# Altium PCB Mach cau H.PcbDoc
Units mm, origin at the board's own origin, x right, y up, seen from the top; angles counter-clockwise.
Board outline 86.48 x 56.38 mm, 2 copper layers (Top Layer, Bottom Layer); 34 components, 30 nets, 89 pads, 0 vias.
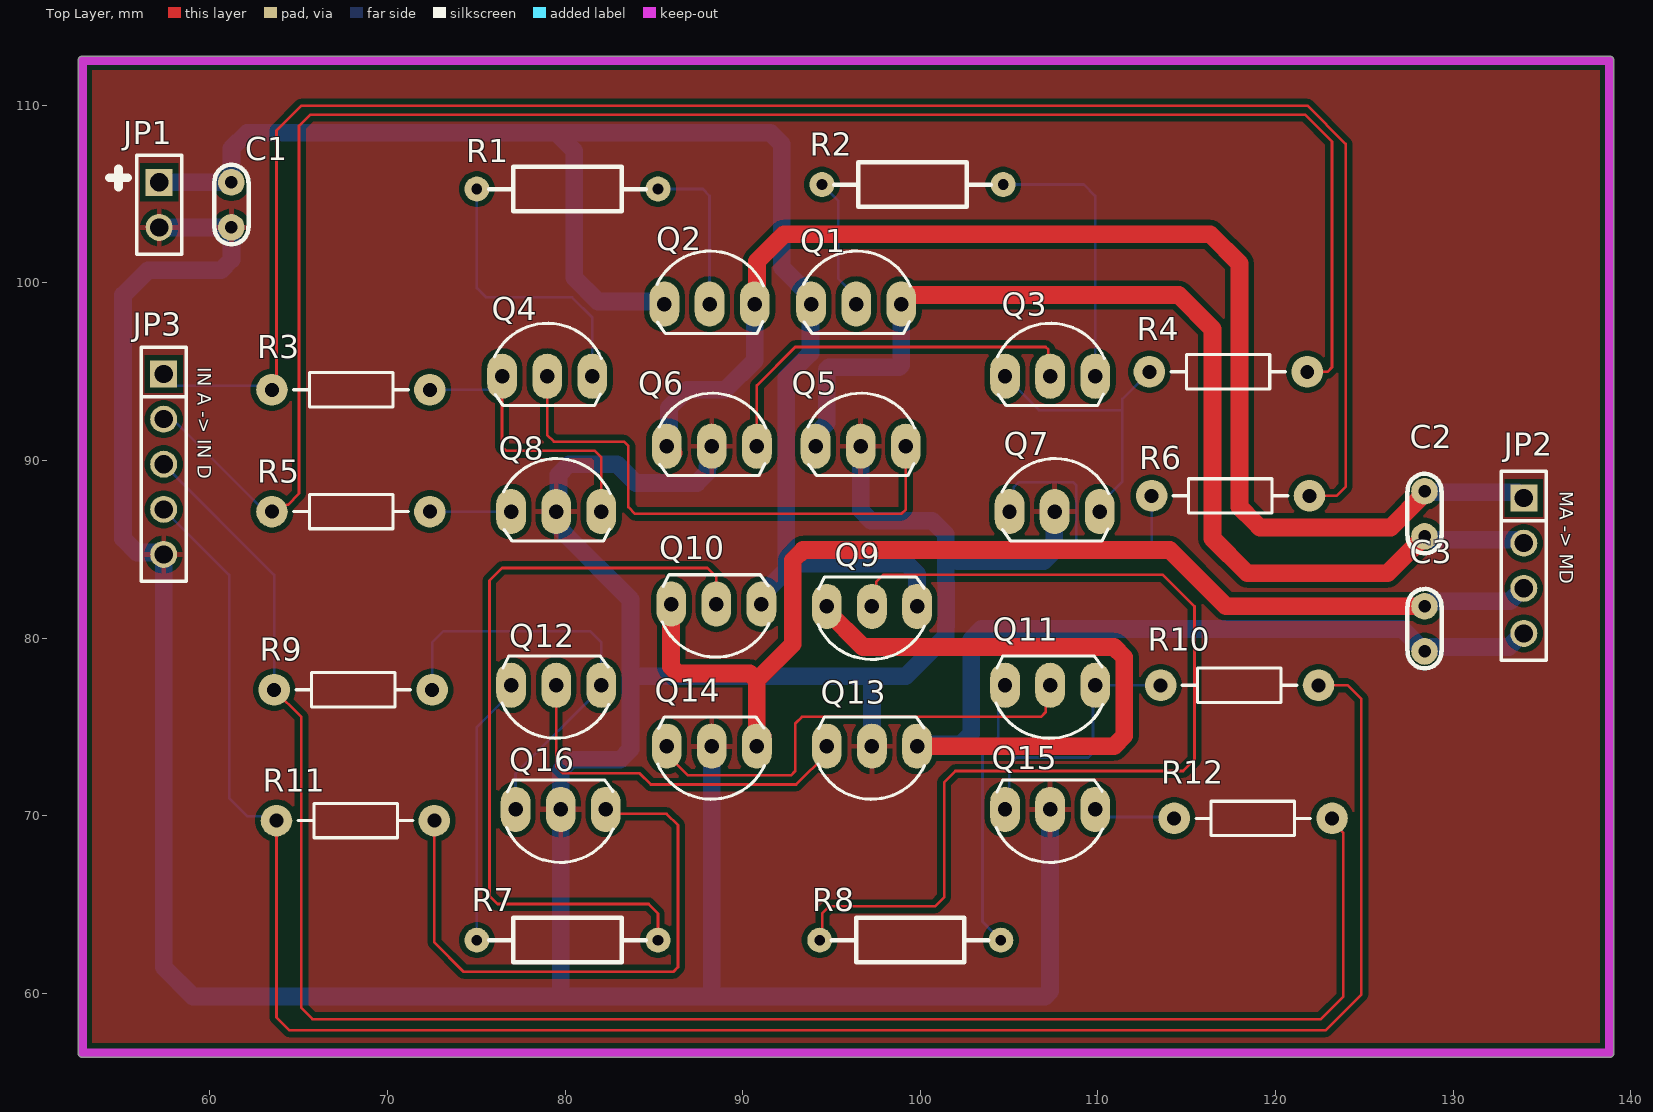
[diagram p0: Top Layer view]
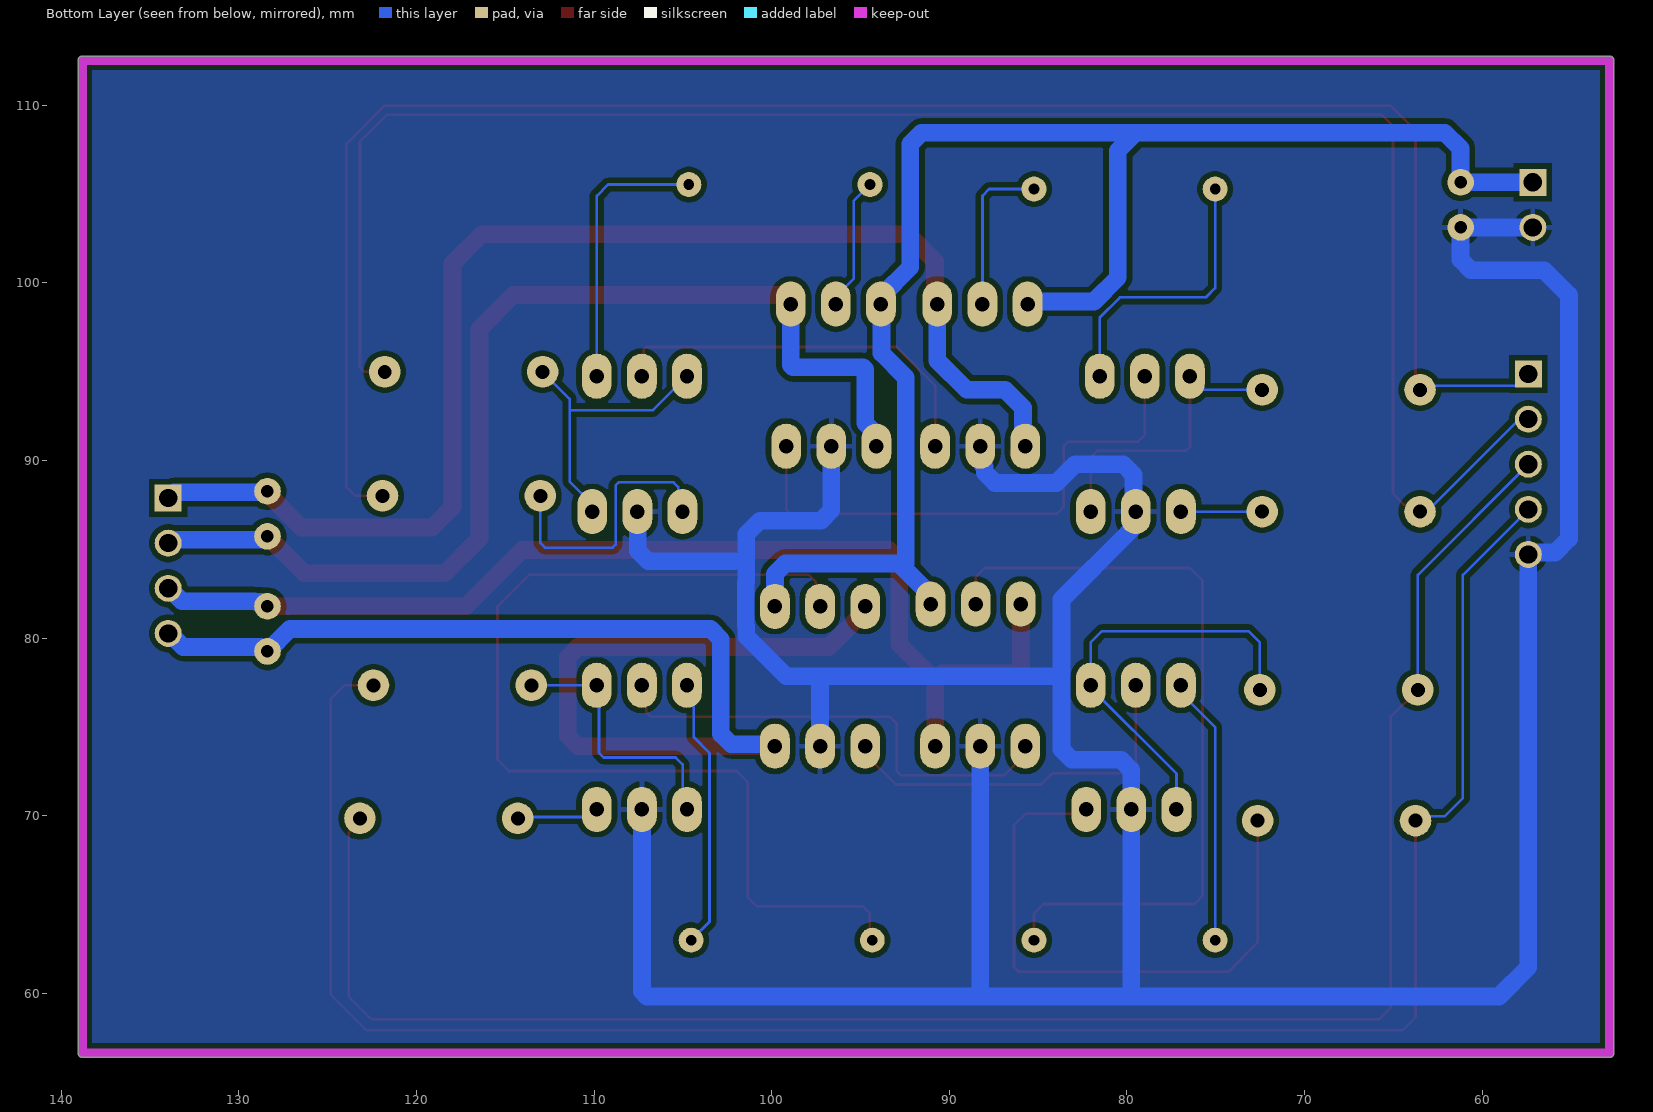
[diagram p1: Bottom Layer view, seen from below]
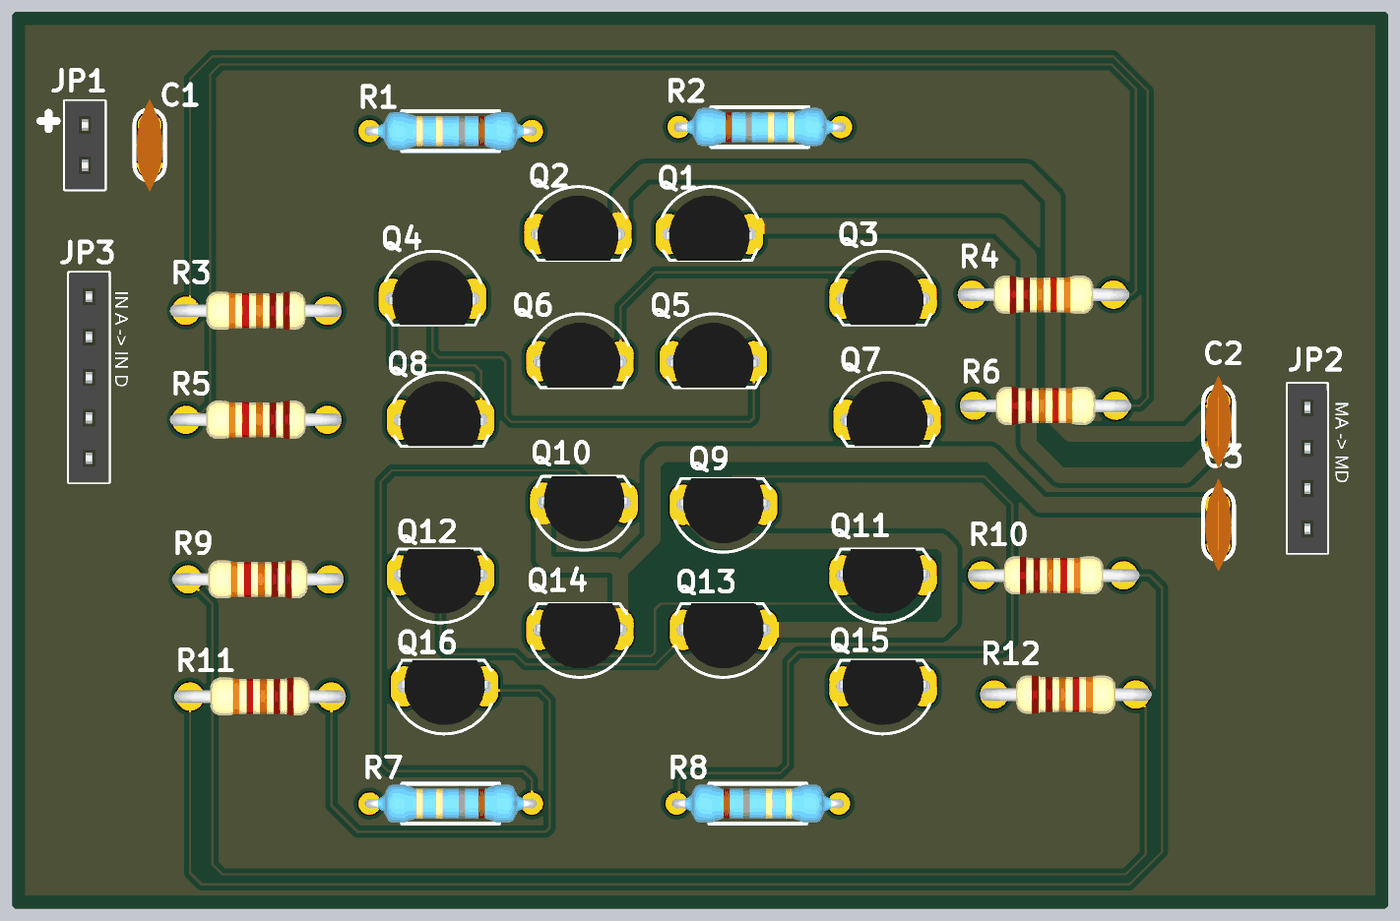
[diagram p2: 3D render of the assembled board from above, using the file's embedded part models]

## Layer stack, top to bottom
Top Solder: solder mask 0.0102, Solder Resist, Dk 3.5
Top Layer: signal copper 0.0356
Dielectric 1: dielectric 0.32, FR-4, Dk 4.8
Bottom Layer: signal copper 0.0356
Bottom Solder: solder mask 0.0102, Solder Resist, Dk 3.5

## Board outline
52.832,56.392 cw(c52.832,56.642) 52.582,56.642 52.582,112.522 cw(c52.832,112.522) 52.832,112.772 138.811,112.772 cw(c138.811,112.522) 139.061,112.522 139.061,56.642 cw(c138.811,56.642) 138.811,56.392

## Design rules (kind name [scope] priority, off if disabled: settings)
Clearance [All] p1: gap=0.3 ignorepadtopadclearanceinfootprint=FALSE
PolygonConnect [All] p1: connectstyle=Relief reliefconductorwidth=0.3 reliefentries=4 polygonreliefangle="90 Angle" airgapwidth=0.3
RoutingVias RoutingVias_Power [InNetClass('Pow class')] p1: holewidth=0.4 width=0.7 viastyle="Through Hole" minholewidth=0.4 minwidth=0.7 maxholewidth=0.6 maxwidth=1.1
RoutingVias RoutingVias_Signal [All] p2: holewidth=0.4 width=0.7 viastyle="Through Hole" minholewidth=0.4 minwidth=0.7 maxholewidth=0.4 maxwidth=0.7
SolderMaskExpansion [All] p1: expansion=0.102 istentingtop=FALSE
Width Width_Power [InNetClass('Pow class')] p1: maxlimit=2 minlimit=0.3 preferedwidth=0.5
Width Width_Signal [All] p2: maxlimit=0.5 minlimit=0.15 preferedwidth=0.15
30 further rules are at their usual default settings.

## Classes and differential pairs
net class "Pow class": GND MA MB MC MD VCC

## Components (designator, comment, footprint, x,y, rotation, side; value= is the part's Value field where it differs from the comment)
C1 "0.1uF, 25V" "tu gom" 61.214,104.394 r270 top
C2 "0.1uF, 25V" "tu gom" 128.397,86.995 r270 top
C3 "0.1uF, 25V" "tu gom" 128.397,80.518 r270 top
JP1 "5V-12VDC" "JP 1x2 CT" 57.15,105.664 r270 top
JP2 "Motor" "JP 1x4 CT" 133.985,87.884 r270 top
JP3 "Controller" "JP 1x5 CT" 57.404,94.869 r270 top
Q1 "C9015" QTO-92 96.393,98.806 r0 top
Q2 "C9015" QTO-92 88.138,98.806 r0 top
Q3 "C1815" QTO-92 107.315,94.742 r0 top
Q4 "C1815" QTO-92 78.994,94.742 r0 top
Q5 "A1015" TO92 96.647,90.805 r0 top
Q6 "A1015" TO92 88.265,90.805 r0 top
Q7 "C1815" QTO-92 107.569,87.122 r0 top
Q8 "C1815" QTO-92 79.502,87.122 r0 top
Q9 "C9015" QTO-92 97.282,81.788 r180 top
Q10 "C9015" QTO-92 88.519,81.915 r180 top
Q11 "C1815" QTO-92 107.315,77.343 r180 top
Q12 "C1815" QTO-92 79.502,77.343 r180 top
Q13 "A1015" TO92 97.282,73.914 r180 top
Q14 "A1015" TO92 88.265,73.914 r180 top
Q15 "C1815" QTO-92 107.315,70.358 r180 top
Q16 "C1815" QTO-92 79.756,70.358 r180 top
R1 "220R, 1/4W" "tro vach 1/4w" 80.137,105.283 r0 top
R2 "220R, 1/4W" "tro vach 1/4w" 99.568,105.537 r180 top
R3 "2k2, 1/8W" R1/4W 63.5,93.98 r0 top value="R1/4W - 1K"
R4 "2k2, 1/8W" R1/4W 121.793,94.996 r180 top value="R1/4W - 1K"
R5 "2k2, 1/8W" R1/4W 63.5,87.122 r0 top value="R1/4W - 1K"
R6 "2k2, 1/8W" R1/4W 121.92,88.011 r180 top value="R1/4W - 1K"
R7 "220R, 1/4W" "tro vach 1/4w" 80.137,62.992 r0 top
R8 "220R, 1/4W" "tro vach 1/4w" 99.441,62.992 r180 top
R9 "2k2, 1/8W" R1/4W 63.627,77.089 r0 top value="R1/4W - 1K"
R10 "2k2, 1/8W" R1/4W 122.428,77.343 r180 top value="R1/4W - 1K"
R11 "2k2, 1/8W" R1/4W 63.754,69.723 r0 top value="R1/4W - 1K"
R12 "2k2, 1/8W" R1/4W 123.19,69.85 r180 top value="R1/4W - 1K"

## Footprints (in the part's own frame and the unit in brackets; to place one, negate y for a bottom-side part, rotate by r counter-clockwise, add the part's x,y. Pads: shape width x height; smd on the part's side, far side on the other; paste and mask are expansions set on the pad)
"JP 1x2 CT" [mm] "JP 1x2 CT"
  rect 1.52x1.52 hole 1.02: 1(0,0)
  round 1.52 hole 1.02: 2(2.54,0)
  silkscreen extent -1.52,-1.27 4.06,1.27, body extent -1.52,-1.25 4.06,1.25, height 8.51
"JP 1x4 CT" [mm]
  rect 1.52x1.52 hole 1.02: 1(0,0)
  round 1.52 hole 1.02: 2(2.54,0) 3(5.08,0) 4(7.62,0)
  silkscreen extent -1.52,-1.27 9.14,1.27, body extent -1.52,-1.25 9.14,1.25, height 8.51
"JP 1x5 CT" [mm]
  rect 1.52x1.52 hole 1.02: 1(0,0)
  round 1.52 hole 1.02: 2(2.54,0) 3(5.08,0) 4(7.62,0) 5(10.16,0)
  silkscreen extent -1.52,-1.27 11.68,1.27, body extent -1.52,-1.25 11.68,1.25, height 8.51
QTO-92 [mil] "TO-92"
  oval 66x100 hole 32: 1(-100,0) 2(0,0) 3(100,0)
  silkscreen extent -117,-65 120,118, body extent -109,-66 109,95, height 245
R1/4W [mil] "R 1/4W, 2 Pin, 350mil"
  round 70 hole 31: 1(0,0) 2(350,0)
  silkscreen extent 48,-38 302,38, body extent -40,-47 386,47, height 111
TO92 [mil] "TO-92"
  oval 66x100 hole 32: 1(-100,0) 2(0,0) 3(100,0)
  silkscreen extent -117,-65 120,118, body extent -109,-66 109,95, height 245
"tro vach 1/4w" [mm]
  round 1.4 hole 0.6: 1(-5.1,0) 2(5.1,0)
  silkscreen extent -4.39,-1.25 4.42,1.25, body extent -5.38,-1.2 5.38,1.2, height 2.41
"tu gom" [mm] "Tu gom mini"
  round 1.5 hole 0.7: 1(-1.27,0) 2(1.27,0)
  silkscreen extent -2.25,-0.97 2.22,0.97, body extent -2.92,-0.85 2.92,0.85, height 6.12

## Part data
C1 C2 C3: library part "Tu gom 101 50V", "Cắm", Chung_Loai=Cắm, Don_Vi=Con, Ma_Hang=MH004764, So_Chan=2, Ten_Linh_Kien="Tụ gốm 101 0.1nF 50V"
JP1: library part "JP 1x2 2.54 Cai Thang", "Cắm", Chung_Loai=Cắm, Don_Vi=Con, Ma_Hang=MH004006, Ten_Linh_Kien="Jump Đơn Cái 2.54MM 1x20P Thẳng"
JP2: library part "JP 1x4 2.54 Cai Thang", "Cắm", Chung_Loai=Cắm, Don_Vi=Con, Ma_Hang=MH004006, Ten_Linh_Kien="Jump Đơn Cái 2.54MM 1x20P Thẳng"
JP3: library part "JP 1x5 2.54 Cai Thang", "Cắm", Chung_Loai=Cắm, Don_Vi=Con, Ma_Hang=MH004006, Ten_Linh_Kien="Jump Đơn Cái 2.54MM 1x20P Thẳng"
Q1 Q2 Q9 Q10: library part PNP_EBC, "P 600mW, EBC"
Q3 Q4 Q7 Q8 Q11 Q12 Q15 Q16: "NPN 600mW, ECB"
Q5 Q6 Q13 Q14: "PNP 600mW, ECB"
R1 R2 R7 R8: library part "Tro Vach 1/4W 5% 220R", "Cắm", Chung_Loai=Cắm, Don_Vi=Con, Ma_Hang=MH007300, So_Chan=2, Ten_Linh_Kien="Trở Vạch 1/4w 5% 220R"
R3 R4 R5 R6 R9 R10 R11 R12: library part R1/4W, "Resistor 1/4W"

## Nets (pads, with @x,y where several pads share a name; then routed paths per layer and width w, separated by ;. In a path a pad name is that pad's centre, name@x,y a point inside that pad or via, vN(x,y) a via of type N, cw(c..) or ccw(c..) an arc to the next point about the centre after c; other vN are vias at no path point)
GND: C1.2 JP1.2 JP3.5 Q5.2 Q6.2 Q7.2 Q8.2 Q13.2 Q14.2 Q15.2 Q16.2 | length 218.2
  Bottom Layer w1: JP1.2 C1.2 61.214,101.297 60.628,100.711 56.515,100.711 55.118,99.314 55.118,85.598 55.894,84.822 57.291,84.822 JP3.5 57.404,61.468 59.055,59.817 79.756,59.817 ; Q14.2 88.265,60.11 87.972,59.817 ; Q6.2 88.136,90.676 88.136,89.765 88.011,89.641 88.011,89.321 87.425,88.735 83.985,88.735 82.931,89.789 80.217,89.789 79.631,89.203 79.631,87.251 Q8.2 79.502,86.372 79.96,85.914 79.96,85.902 83.693,82.169 83.693,77.851 ; Q5.2 96.647,87.2 97.233,86.614 100.672,86.614 101.443,85.843 101.443,83.155 101.46,83.137 101.46,80.678 101.443,80.66 101.443,80.107 99.187,77.851 97.116,77.851 ; Q13.2 97.282,77.685 97.116,77.851 ; 102.108,84.328 106.956,84.328 107.542,84.914 107.542,87.095 Q7.2 ; Q15.2 107.315,60.11 107.022,59.817 87.972,59.817 ; 79.756,59.817 87.972,59.817 ; 79.756,59.817 Q16.2 79.756,72.566 80.342,73.152 83.107,73.152 83.693,73.738 83.693,77.851 ; 83.693,77.851 97.116,77.851
"IN A": JP3.1 R3.1 R6.1 | length 104.4
  Top Layer w0.15: R3.1 63.754,94.234 63.754,108.585 65.151,109.982 121.794,109.982 123.952,107.824 123.952,88.519 123.444,88.011 R6.1
  Bottom Layer w0.15: JP3.1 58.056,94.217 63.263,94.217 R3.1
"IN B": JP3.2 R4.1 R5.1 | length 104.2
  Top Layer w0.15: R5.1 63.941,87.122 64.324,87.506 64.392,87.506 65.024,88.138 65.024,108.839 65.659,109.474 121.666,109.474 123.19,107.95 123.19,95.25 122.936,94.996 R4.1
  Bottom Layer w0.15: JP3.2 57.666,92.067 58.174,92.067 63.119,87.122 R5.1
"IN C": JP3.3 R9.1 R12.1 | length 103.6
  Top Layer w0.15: R9.1 65.151,75.565 65.151,59.182 65.786,58.547 122.555,58.547 123.825,59.817 123.825,69.034 123.19,69.669 R12.1
  Bottom Layer w0.15: JP3.3 63.627,83.566 R9.1
"IN D": JP3.4 R10.1 R11.1 | length 113.7
  Top Layer w0.15: R11.1 63.754,58.635 64.477,57.912 122.809,57.912 124.841,59.944 124.841,76.581 124.079,77.343 R10.1
  Bottom Layer w0.15: JP3.4 61.087,83.566 61.087,70.993 62.103,69.977 63.5,69.977 R11.1
MA: C2.1 JP2.1 Q2.3 Q6.1 | length 74.1
  Top Layer w1: Q6.1 85.813,90.717 Q6.1@86.106,90.424 ; Q2.3 90.807,98.935 90.807,101.221 92.329,102.743 116.332,102.743 117.983,101.092 117.983,87.376 118.833,86.526 119.126,86.233 126.492,86.233 128.397,88.138 C2.1
  Bottom Layer w1: Q6.1 85.854,90.934 85.854,92.966 86.868,93.98 89.027,93.98 90.678,95.631 Q2.3 ; C2.1 128.444,88.218 133.651,88.218 JP2.1
MB: C2.2 JP2.2 Q1.3 Q5.1 | length 62.5
  Top Layer w1: Q5.1 Q5.1@94.355,91.053 ; Q1.3 98.933,99.002 99.245,99.314 114.554,99.314 116.459,97.409 116.459,85.608 118.422,83.645 126.317,83.645 C2.2
  Bottom Layer w1: Q5.1 94.107,91.47 94.742,92.105 94.742,95.123 94.869,95.25 98.806,95.25 98.933,95.377 Q1.3 ; C2.2 128.588,85.534 133.794,85.534 JP2.2
MC: C3.1 JP2.3 Q10.3 Q14.1 | length 63
  Top Layer w1: Q10.3 85.963,81.899 85.963,78.39 86.344,78.009 90.408,78.009 90.789,77.628 ; Q14.1@90.789,74.147 Q14.1@91.117,74.475 ; Q14.1@90.789,74.475 90.789,77.628 ; C3.1 117.221,81.788 114.046,84.963 93.407,84.963 92.821,84.377 92.821,79.66 90.789,77.628
  Bottom Layer w1: C3.1 128.655,82.046 129.101,82.046 129.128,82.073 133.209,82.073 133.94,82.804 JP2.3
MD: C3.2 JP2.4 Q9.3 Q13.1 | length 75.4
  Top Layer w1: Q9.3 94.742,81.534 96.774,79.502 110.907,79.502 111.493,78.916 111.493,74.5 110.907,73.914 Q13.1
  Bottom Layer w1: Q13.1 100.027,73.914 100.134,74.021 102.284,74.021 102.87,74.607 102.87,79.932 103.456,80.518 127.127,80.518 C3.2 128.532,79.248 128.786,79.502 133.139,79.502 133.901,80.264 JP2.4
NetQ1_2: Q1.2 R2.2 | length 7.5
  Bottom Layer w0.15: R2.2 95.377,104.628 95.377,100.254 96.393,99.238 Q1.2
NetQ2_2: Q2.2 R1.2 | length 9.2
  Bottom Layer w0.15: R1.2 87.757,105.283 88.138,104.902 Q2.2
NetQ3_1: Q3.1 Q7.3 R4.2 | length 16.4
  Bottom Layer w0.15: Q3.1 104.775,94.723 105.48,94.018 105.499,94.018 106.68,92.837 111.379,92.837 ; Q7.3 110.109,87.554 111.379,88.824 111.379,92.837 ; R4.2 111.379,93.472 111.379,92.837
NetQ3_3: Q3.3 R2.1 | length 15.6
  Bottom Layer w0.15: R2.1 109.22,105.537 109.855,104.902 Q3.3
NetQ4_1: Q4.1 Q8.3 R3.2 | length 17.2
  Top Layer w0.15: Q4.1 76.454,90.766 76.669,90.551 81.66,90.551 82.042,90.169 Q8.3
  Bottom Layer w0.15: R3.2 75.711,93.98 76.454,94.723 Q4.1
NetQ4_3: Q4.3 R1.1 | length 16.1
  Bottom Layer w0.15: R1.1 75.037,99.715 75.565,99.187 80.391,99.187 81.534,98.044 Q4.3
NetQ7_1: Q7.1 R6.2 | length 15.6
  Bottom Layer w0.15: Q7.1 105.275,87.368 105.275,88.511 105.537,88.773 108.624,88.773 108.795,88.602 108.795,85.261 108.966,85.09 112.776,85.09 113.03,85.344 R6.2
NetQ8_1: Q8.1 R5.2 | length 4.6
  Bottom Layer w0.15: R5.2 Q8.1
NetQ9_2: Q9.2 R8.2 | length 58.9
  Top Layer w0.15: R8.2 94.488,63.139 94.488,64.516 94.869,64.897 100.838,64.897 101.346,65.405 101.346,71.882 101.981,72.517 114.808,72.517 115.443,73.152 115.443,81.788 113.665,83.566 97.917,83.566 97.528,83.177 97.528,82.034 Q9.2
NetQ10_2: Q10.2 R7.2 | length 44
  Top Layer w0.15: R7.2 85.237,64.496 84.709,65.024 76.2,65.024 75.749,65.475 75.749,83.242 76.454,83.947 88.011,83.947 88.519,83.439 Q10.2
NetQ11_1: Q11.1 Q15.3 R10.2 | length 15.2
  Bottom Layer w0.15: Q15.3 105.021,70.604 105.021,72.89 105.41,73.279 109.474,73.279 109.728,73.533 109.728,77.216 Q11.1 R10.2
NetQ11_3: Q11.3 R8.1 | length 15.3
  Bottom Layer w0.15: R8.1 103.505,64.028 103.505,73.533 104.394,74.422 104.394,76.117 104.775,76.498 Q11.3
NetQ12_1: Q12.1 Q16.3 R9.2 | length 24.1
  Bottom Layer w0.15: R9.2 72.517,79.756 73.152,80.391 81.407,80.391 82.042,79.756 Q12.1 ; Q16.3 77.216,72.378 Q12.1@82.042,77.204
  Bottom Layer w0.5: Q12.1@82.042,77.204 Q12.1
NetQ12_3: Q12.3 R7.1 | length 15.1
  Bottom Layer w0.15: R7.1 75.037,74.986 76.962,76.911 Q12.3
NetQ15_1: Q15.1 R12.2 | length 4.7
  Bottom Layer w0.15: Q15.1 110.287,69.926 114.224,69.926 R12.2
NetQ16_1: Q16.1 R11.2 | length 33.8
  Top Layer w0.15: R11.2 72.644,62.865 74.295,61.214 86.106,61.214 86.36,61.468 86.36,69.469 85.725,70.104 82.55,70.104 Q16.1
TA: Q4.2 Q5.3 | length 31
  Top Layer w0.15: Q4.2 78.994,91.44 79.375,91.059 83.312,91.059 83.566,90.805 83.566,87.376 83.947,86.995 98.933,86.995 99.187,87.249 Q5.3
TB: Q3.2 Q6.3 | length 22.3
  Top Layer w0.15: Q6.3 90.805,94.234 92.964,96.393 107.061,96.393 107.217,96.237 107.217,94.84 Q3.2
TC: Q12.2 Q13.3 | length 21.4
  Top Layer w0.15: Q12.2 79.502,72.771 79.883,72.39 84.201,72.39 84.836,71.755 93.015,71.755 94.742,73.482 Q13.3
TD: Q11.2 Q14.3 | length 26.9
  Top Layer w0.15: Q14.3 85.725,73.482 86.938,72.269 92.716,72.269 92.964,72.517 92.964,75.184 93.345,75.565 106.807,75.565 107.069,75.827 107.069,77.097 Q11.2
VCC: C1.1 JP1.1 Q1.1 Q2.1 Q9.1 Q10.1 | length 89
  Bottom Layer w1: JP1.1 C1.1 61.214,107.569 62.103,108.458 79.502,108.458 ; Q2.1 85.446,98.958 81.857,98.958 80.518,100.297 80.518,107.442 79.502,108.458 ; Q10.1 91.059,82.423 92.837,84.201 ; 92.456,84.201 92.456,94.675 93.817,96.036 93.817,98.77 Q1.1 93.853,99.23 92.202,100.881 92.202,107.823 91.567,108.458 79.502,108.458 ; 92.71,84.201 99.236,84.201 99.822,83.615 Q9.1

## Polygon pours and split planes (outlines as drawn)
GND on Top Layer "NONET_L-01_P-001" (solid, remove dead copper, pour order 0): 52.832,112.522 52.959,112.395 138.684,112.395 138.684,56.769 138.557,56.642 52.832,56.642
GND on Bottom Layer "NONET_L-01_P-001" (solid, remove dead copper, pour order 1): 52.959,112.522 138.557,112.522 138.811,112.268 138.811,56.642 52.959,56.642 52.832,56.769

## Keep-outs
Keep-Out Layer:
  lines w0.5: 52.832,56.642 138.811,56.642 138.811,112.522 52.832,112.522 52.832,56.642

## Silkscreen, mask and mechanical layers (free items; w line width, h text height)
Top Overlay:
  lines w0.5: 54.356,105.918 55.372,105.918 ; 54.864,105.41 54.864,106.426
  text "IN A -> IN D" at 59.055,95.25 h1.3 r270
  text "MA -> MD" at 135.763,88.265 h1.3 r270